# Altium PCB ESC_altimeter_v01.PcbDoc
Units mm, origin at the board's own origin, x right, y up, seen from the top; angles counter-clockwise.
Board outline 61.5 x 25 mm, 2 copper layers (Top Layer, Bottom Layer); 2 components, 4 nets, 40 pads, 0 vias.
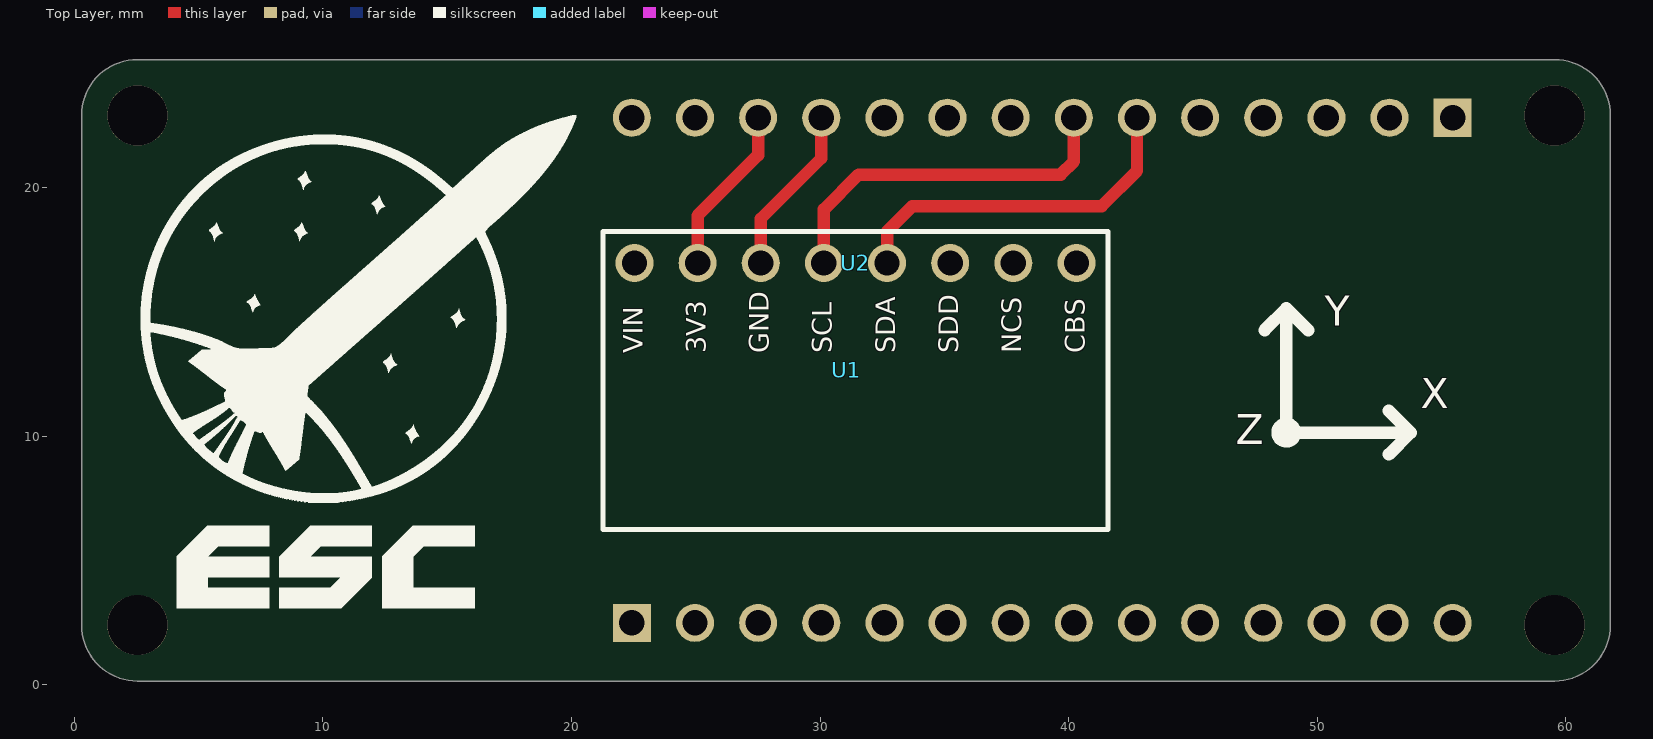
[diagram p0: Top Layer view]
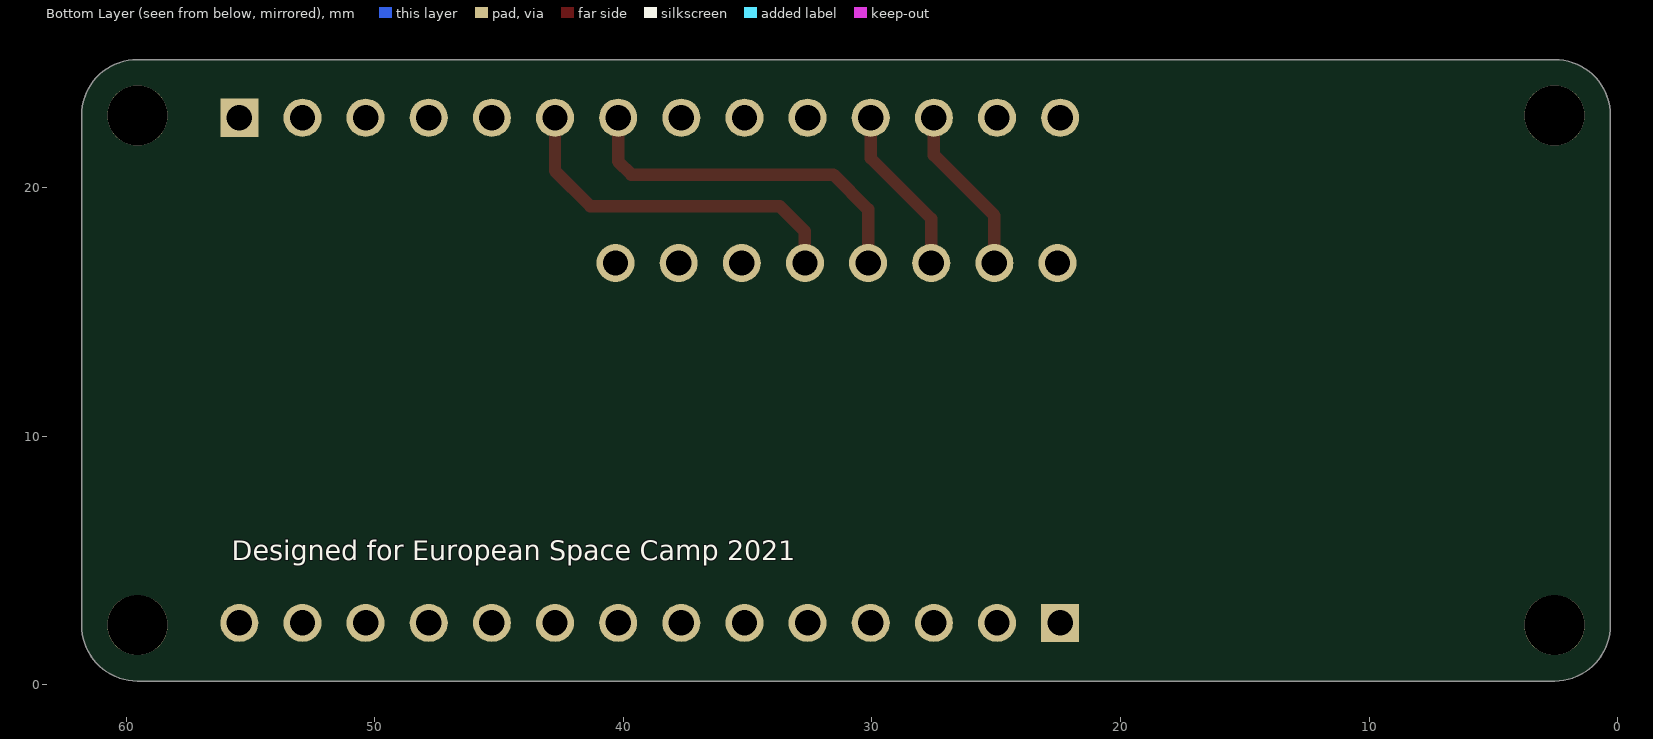
[diagram p1: Bottom Layer view, seen from below]

## Layer stack, top to bottom
Top Solder: solder mask 0.0102, Solder Resist, Dk 3.5
Top Layer: signal copper 0.0356
Dielectric 1: dielectric 0.32, FR-4, Dk 4.8
Bottom Layer: signal copper 0.0356
Bottom Solder: solder mask 0.0102, Solder Resist, Dk 3.5

## Board outline
0.289,2.404 ccw(c2.539,2.404) 2.539,0.154 59.539,0.154 ccw(c59.539,2.404) 61.789,2.404 61.789,22.904 ccw(c59.539,22.904) 59.539,25.154 2.539,25.154 ccw(c2.539,22.904) 0.289,22.904

## Design rules (kind name [scope] priority, off if disabled: settings)
Clearance [All] p1: gap=0.254 ignorepadtopadclearanceinfootprint=FALSE except(0: Arc-Hole Track-Hole SMDPad-Hole THPad-Hole Via-Hole Fill-Hole Poly-Hole Region-Hole Text-Hole)
PolygonConnect [All] p1: connectstyle=Relief reliefconductorwidth=0.254 reliefentries=4 polygonreliefangle="90 Angle" airgapwidth=0.254
RoutingVias [All] p1: holewidth=0.711 width=1.27 viastyle="Through Hole" minholewidth=0.711 minwidth=1.27 maxholewidth=0.711 maxwidth=1.27
SolderMaskExpansion [All] p1: expansion=0.102 istentingtop=FALSE
Width [All] p1: maxlimit=0.5 minlimit=0.254 preferedwidth=0.254
30 further rules are at their usual default settings.

## Components (designator, comment, footprint, x,y, rotation, side; value= is the part's Value field where it differs from the comment)
U1 "ARDUINO_MKR_ZERO" MODULE_ARDUINO_MKR_ZERO 31.039,12.654 r0 top
U2 "MPU9250" MPU9250 40.31,16.972 r180 top

## Footprints (in the part's own frame and the unit in brackets; to place one, negate y for a bottom-side part, rotate by r counter-clockwise, add the part's x,y. Pads: shape width x height; smd on the part's side, far side on the other; paste and mask are expansions set on the pad)
MODULE_ARDUINO_MKR_ZERO [mm]
  rect 1.53x1.53 hole 1.02: J4_1(-8.615,-10.16) J5_1(24.405,10.16)
  round 1.53 hole 1.02: J4_2(-6.075,-10.16) J4_3(-3.535,-10.16) J4_4(-0.995,-10.16) J4_5(1.545,-10.16) J4_6(4.085,-10.16) J4_7(6.625,-10.16) J4_8(9.165,-10.16) J4_9(11.705,-10.16) J4_10(14.245,-10.16) J4_11(16.785,-10.16) J4_12(19.325,-10.16) J4_13(21.865,-10.16) J4_14(24.405,-10.16) J5_2(21.865,10.16) J5_3(19.325,10.16) J5_4(16.785,10.16) J5_5(14.245,10.16) J5_6(11.705,10.16) J5_7(9.165,10.16) J5_8(6.625,10.16) J5_9(4.085,10.16) J5_10(1.545,10.16) J5_11(-0.995,10.16) J5_12(-3.535,10.16) J5_13(-6.075,10.16) J5_14(-8.615,10.16)
  round 2.42 hole 2.42 unplated: ""(-28.5,-10.25) ""(-28.5,10.25) ""(28.5,-10.25) ""(28.5,10.25)
MPU9250 [mm]
  round 1.53 hole 1.02: 1(0,0) 2(2.54,0) 3(5.08,0) 4(7.62,0) 5(10.16,0) 6(12.7,0) 7(15.24,0) 8(17.78,0)
  silkscreen extent -1.27,-1.27 19.05,10.73

## Part data
U1: "ATSAMD21 Arduino MKR Zero with Headers SAM D ARMÂ® CortexÂ®-M0+ MCU 32-Bit Embedded Evaluation Board", Package=None, Availability=Unavailable, Check_prices=https://www.snapeda.com/parts/ARDUINO%20MKR%20ZERO/Arduino/view-part/2709581/?ref=eda, MF=Arduino, MP="ARDUINO MKR ZERO", Price=None, SnapEDA_Link=https://www.snapeda.com/parts/ARDUINO%20MKR%20ZERO/Arduino/view-part/2709581/?ref=snap

## Nets (pads, with @x,y where several pads share a name; then routed paths per layer and width w, separated by ;. In a path a pad name is that pad's centre, name@x,y a point inside that pad or via, vN(x,y) a via of type N, cw(c..) or ccw(c..) an arc to the next point about the centre after c; other vN are vias at no path point)
GND: U1.J5_11 U2.6 | length 6.9
  Top Layer w0.5: U2.6 27.61,18.75 30.044,21.184 U1.J5_11
SCL: U1.J5_7 U2.5 | length 14.8
  Top Layer w0.5: U2.5 30.15,19.131 31.547,20.528 39.675,20.528 40.204,21.057 U1.J5_7
SDA: U1.J5_6 U2.4 | length 14.5
  Top Layer w0.5: U2.4 32.69,18.242 33.706,19.258 41.326,19.258 42.744,20.676 U1.J5_6
VCC: U1.J5_12 U2.7 | length 6.9
  Top Layer w0.5: U2.7 25.07,18.877 27.504,21.311 U1.J5_12
pads on no net: U1. U1.J4_1 U1.J4_2 U1.J4_3 U1.J4_4 U1.J4_5 U1.J4_6 U1.J4_7 U1.J4_8 U1.J4_9 U1.J4_10 U1.J4_11 U1.J4_12 U1.J4_13 U1.J4_14 U1.J5_1 U1.J5_2 U1.J5_3 U1.J5_4 U1.J5_5 U1.J5_8 U1.J5_9 U1.J5_10 U1.J5_13 U1.J5_14 U2.1 U2.2 U2.3 U2.8

## Silkscreen, mask and mechanical layers (free items; w line width, h text height)
Top Overlay:
  drawing of 23 lines, arcs and shapes, not listed
  text "Y" at 50.3,14.449 h1.2
  text "X" at 54.168,11.136 h1.2
  text "Z" at 46.721,9.679 h1.2
Bottom Overlay:
  text "Designed for European Space Camp 2021" at 55.746,5.021 h0.8

## Text inside footprints (layer, text, board x,y; h text height)
U2: Top Overlay "NCS" at 38.094,13.331 h0.8 r90; Top Overlay "CBS" at 40.634,13.331 h0.8 r90; Top Overlay "SDD" at 35.554,13.331 h0.8 r90; Top Overlay "SDA" at 33.014,13.331 h0.8 r90; Top Overlay "SCL" at 30.474,13.331 h0.8 r90; Top Overlay "GND" at 27.934,13.331 h0.8 r90; Top Overlay "3V3" at 25.394,13.331 h0.8 r90; Top Overlay "VIN" at 22.854,13.331 h0.8 r90